# Altium PCB ad_test2_PCB_Temp.PcbDoc
Units mm, origin at the board's own origin, x right, y up, seen from the top; angles counter-clockwise.
Board outline 48 x 22 mm, 2 copper layers (Top Layer, Bottom Layer); 23 components, 22 nets, 98 pads, 16 vias.
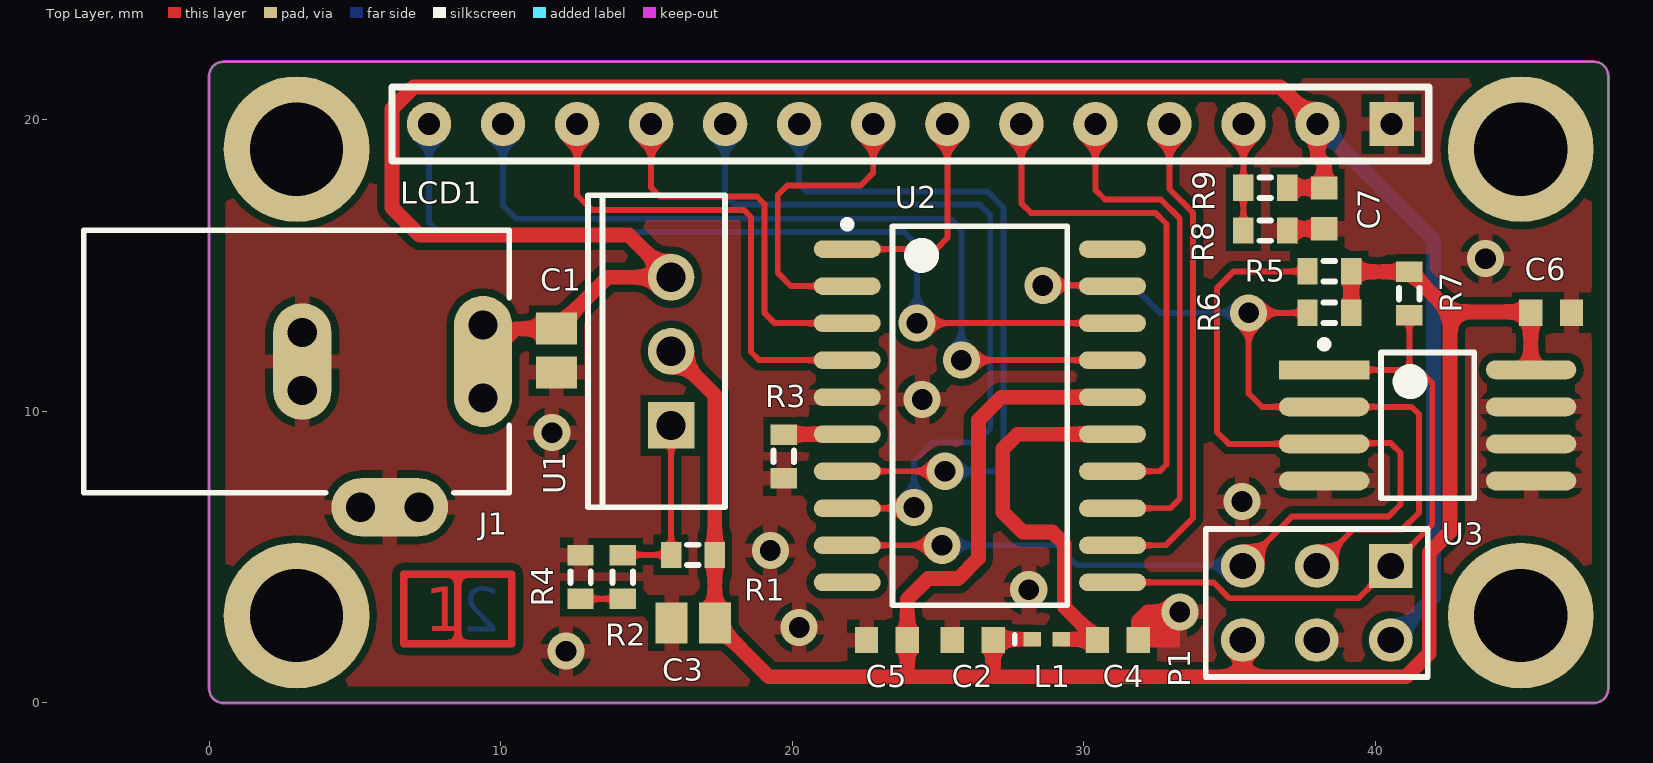
[diagram p0: Top Layer view]
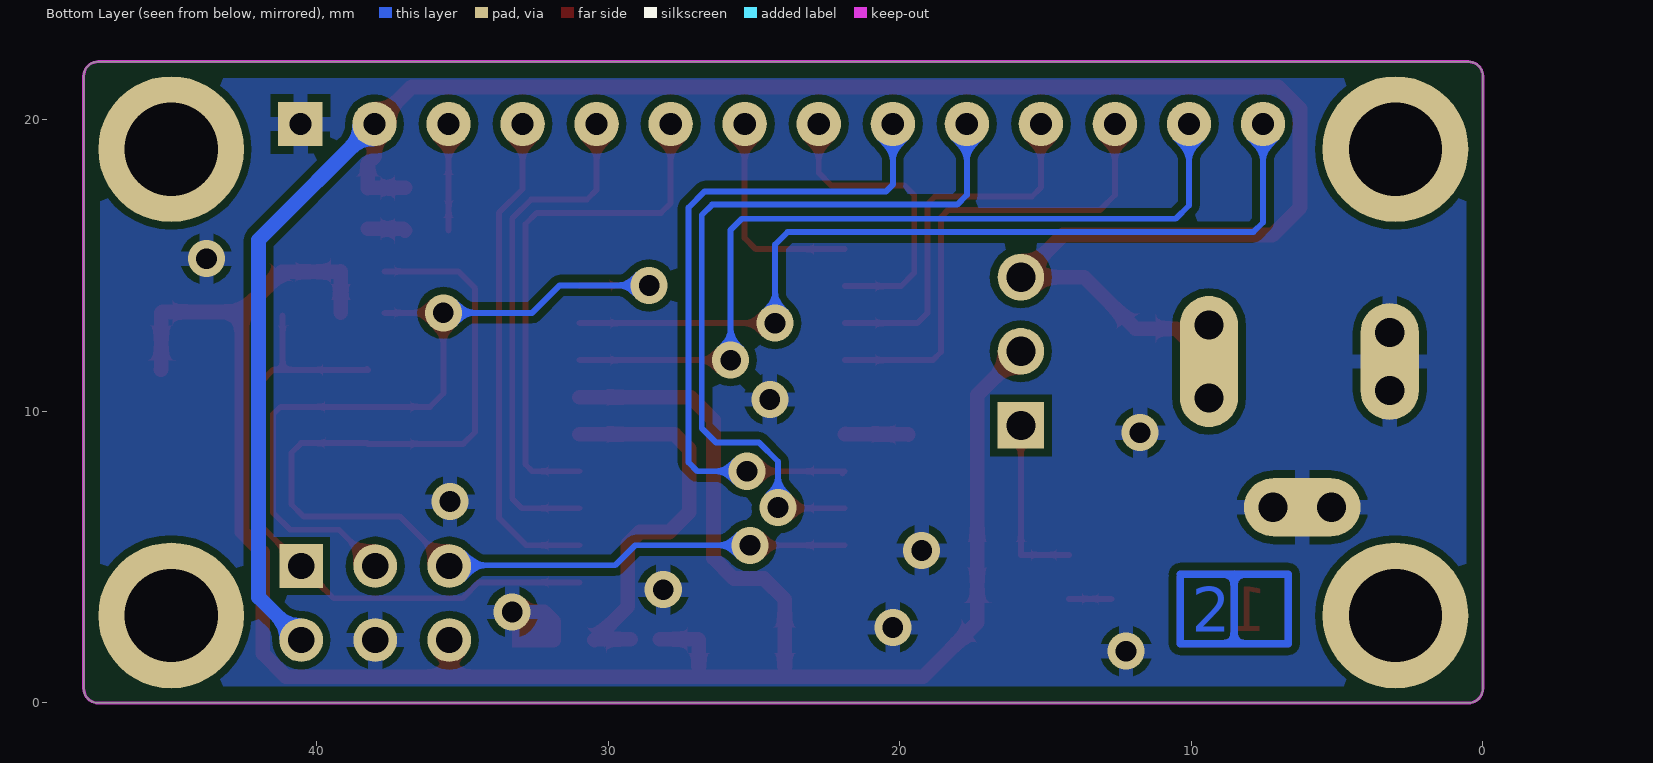
[diagram p1: Bottom Layer view, seen from below]

## Layer stack, top to bottom
Top Solder: solder mask 0.0102, Solder Resist, Dk 3.5
Top Layer: signal copper 0.0356
Dielectric 1: dielectric 0.32, FR-4, Dk 4.8
Bottom Layer: signal copper 0.0356
Bottom Solder: solder mask 0.0102, Solder Resist, Dk 3.5

## Board outline
0,0.5 0,21.5 cw(c0.5,21.5) 0.5,22 47.5,22 cw(c47.5,21.5) 48,21.5 48,0.502 48,0.5 cw(c47.5,0.5) 47.5,0 0.5,0 cw(c0.5,0.5)

## Design rules (kind name [scope] priority, off if disabled: settings)
Clearance Keep-out [(InNetClass('All Nets') AND InPolygon) vs OnLayer('Keep-Out Layer')] p1: gap=0.508 ignorepadtopadclearanceinfootprint=TRUE
Clearance [All] p2: gap=0.254 ignorepadtopadclearanceinfootprint=FALSE except(0: Arc-Hole Track-Hole SMDPad-Hole THPad-Hole Via-Hole Fill-Hole Poly-Hole Region-Hole Text-Hole)
HoleSize [All] p1: absolutevalues=TRUE maxlimit=5.08 minlimit=0.025 maxpercent=80.000 minpercent=20.000
MinimumSolderMaskSliver [All] p1: minsoldermaskwidth=0.127
PolygonConnect [All] p1: connectstyle=Relief reliefconductorwidth=0.508 reliefentries=4 polygonreliefangle="90 Angle" airgapwidth=0.254
RoutingVias [All] p1: holewidth=0.711 width=1.27 viastyle="Through Hole" minholewidth=0.711 minwidth=1.27 maxholewidth=0.711 maxwidth=1.27
SilkToSilkClearance [All] p1: silktosilkclearance=0.025
SilkToSolderMaskClearance [IsPad] p1: minsilkscreentomaskgap=0.025 clearancetoexposedcopper=TRUE
SolderMaskExpansion [All] p1: expansion=0.102
Width [All] p1: maxlimit=0.508 minlimit=0.203 preferedwidth=0.254
26 further rules are at their usual default settings.

## Classes and differential pairs
net class RB[0..7]: RB0 RB1 RB2 RB3 RB4 RB5 RB6 RB7
component class Sensor: C6 U3
component class Power: C1 C2 C3 C4 J1 L1 R1 R2 R3 R4 U1
component class MCU: C5 R5 R6 R7 U2
component class LCD: C7 LCD1 R8 R9
component class ad_test2_top: P1

## Components (designator, comment, footprint, x,y, rotation, side; value= is the part's Value field where it differs from the comment)
C1 "Cap Pol3" C0805 11.913,12.09 r270 top value=100pF (schematic designator C4)
C2 "Cap Semi" 1608[0603] 26.199,2.159 r0 top value=100pF (schematic designator C5)
C3 "Cap Pol3" C0805 16.612,2.743 r180 top value=100pF
C4 "Cap Semi" 1608[0603] 31.177,2.159 r180 top value=100pF (schematic designator C6)
C5 "Cap Semi" 1608[0603] 23.252,2.159 r0 top value=100pF (schematic designator C2)
C6 "Cap Semi" 1608[0603] 46.039,13.386 r180 top value=100pF (schematic designator C7)
C7 "Cap Semi" 1608[0603] 38.252,16.967 r90 top value=100pF (schematic designator C1)
J1 "PWR2.5" KLD-0202 -4.302,11.715 r0 top
L1 "Inductor" 0402-A 28.735,2.184 r0 top value=10mH
LCD1 "DMC-50448N" DMC-50448N 40.564,19.863 r180 top
P1 "Header 3X2" HDR2X3 40.538,4.699 r180 top
R1 "Res3" J1-0603 16.598,5.08 r180 top value=4.7K (schematic designator R6)
R2 "Res3" J1-0603 14.193,4.321 r270 top value=4.7K (schematic designator R7)
R3 "Res3" J1-0603 19.71,8.458 r90 top value=1K (schematic designator R8)
R4 "Res3" J1-0603 12.745,4.321 r90 top value=4.7K (schematic designator R9)
R5 "Res3" J1-0603 38.43,14.808 r180 top value=1K (schematic designator R3)
R6 "Res3" J1-0603 38.43,13.386 r180 top value=1K (schematic designator R4)
R7 "Res3" J1-0603 41.173,14.046 r270 top value=1K (schematic designator R5)
R8 "Res3" J1-0603 36.232,16.205 r0 top value=1K (schematic designator R2)
R9 "Res3" J1-0603 36.232,17.678 r180 top value=1K (schematic designator R1)
U1 "LM317KC" KC03 15.85,12.065 r90 top (schematic designator U2)
U2 "PIC16C770-I/SO" SOIC-SO20_N 26.441,9.855 r0 top (schematic designator U1)
U3 "TCN75" TCN75-SOIC 38.252,11.43 r0 top

## Footprints (in the part's own frame and the unit in brackets; to place one, negate y for a bottom-side part, rotate by r counter-clockwise, add the part's x,y. Pads: shape width x height; smd on the part's side, far side on the other; paste and mask are expansions set on the pad)
0402-A [mm] "Chip Inductor, Body 1.0x0.5mm, IPC High Density"
  rect 0.6x0.5 smd: 1(-0.5,0) 2(0.5,0)
  silkscreen extent -1.1,-0.15 -1.1,0.15, body extent -0.55,-0.3 0.55,0.3, height 0.55
1608[0603] [mm] "Chip Capacitor, Body 1.6x0.8mm, IPC High Density"
  rect 0.8x0.9 smd: 1(-0.7,0) 2(0.7,0)
  body extent -0.87,-0.48 0.87,0.48, height 1.3
C0805 [mm] "Chip Capacitor, Body 2.0x1.3mm, IPC High Density"
  rect 1.1x1.4 smd: 1(-0.75,0) 2(0.75,0)
  body extent -1.1,-0.72 1.1,0.72, height 1.4
DMC-50448N [mil] "LCD,DMC-50448N"
  rect 60x60 hole 30: 1(0,0)
  round 60 hole 30: 2(100,0) 3(200,0) 4(300,0) 5(400,0) 6(500,0) 7(600,0) 8(700,0) 9(800,0) 10(900,0) 11(1000,0) 12(1100,0) 13(1200,0) 14(1300,0)
  silkscreen extent -50,-50 1350,50, body extent -10,50 -10,50, height 10
HDR2X3 [mm] "Connector; Header; 3x2 Position"
  rect 1.5x1.5 hole 0.9: 1(0,0)
  round 1.5 hole 0.9: 2(0,2.54) 3(2.54,0) 4(2.54,2.54) 5(5.08,0) 6(5.08,2.54)
  silkscreen extent -1.27,-1.27 6.35,3.81
J1-0603 [mm] "Chip Resistor, Body 1.6x0.8mm, IPC High Density"
  rect 0.7x0.9 smd: 1(-0.75,0) 2(0.75,0)
  silkscreen extent -0.2,-0.35 0.2,0.35, body extent -0.85,-0.48 0.85,0.48, height 0.9
KC03 [mm] "TO, Thru-Hole, Vertical, Heatsink Mounted; 3 In-Line Leads; Pitch 2.54 mm"
  rect 1.6x1.6 hole 1: 1(-2.54,0)
  round 1.6 hole 1: 2(0,0) 3(2.54,0)
  silkscreen extent -5.35,-1.85 5.35,2.85
KLD-0202 [mm] "DC Power Jack, 2.5mm, KLD Series, PCB Mount"
  oval 2x4.5 all layers, no hole: 1(13.7,0)
  round 1.5 hole 1: 1A(13.7,-1.25) 1B(13.7,1.25) 2A(7.5,-1) 2B(7.5,1) 3A(9.5,-5) 3B(11.5,-5)
  oval 2x4 all layers, no hole: 2(7.5,0)
  oval 4x2 all layers, no hole: 3(10.5,-5)
  silkscreen extent 0,-4.5 14.6,4.5
SOIC-SO20_N [mm] "SOIC, 20-Leads, Body 12.8x7.5mm, Pitch 1.27mm, IPC Medium Density"
  oval 2.3x0.6 smd: 1(-4.55,5.715) 2(-4.55,4.445) 3(-4.55,3.175) 4(-4.55,1.905) 5(-4.55,0.635) 6(-4.55,-0.635) 7(-4.55,-1.905) 8(-4.55,-3.175) 9(-4.55,-4.445) 10(-4.55,-5.715) 11(4.55,-5.715) 12(4.55,-4.445) 13(4.55,-3.175) 14(4.55,-1.905) 15(4.55,-0.635) 16(4.55,0.635) 17(4.55,1.905) 18(4.55,3.175) 19(4.55,4.445) 20(4.55,5.715)
  silkscreen extent -4.67,-6.5 3,6.69, body extent -3.75,-6.5 3.75,6.5, height 2.65
TCN75-SOIC [mm] "TCN75-SOIC, 8-Leads, Body 4.90x3.90mm, Pitch 1.27mm, IPC Low Density"
  rect 3.1x0.65 smd: 1(0,0)
  oval 3.1x0.65 smd: 2(0,-1.27) 3(0,-2.54) 4(0,-3.81) 5(7.1,-3.81) 6(7.1,-2.54) 7(7.1,-1.27) 8(7.1,0)
  silkscreen extent -0.12,-4.41 5.15,1, body extent 1.55,-4.41 5.55,0.6, height 1.75

## Part data
C1 C3: "Polarized Capacitor (Surface Mount)", LatestRevisionDate=29-May-2009, LatestRevisionNote="IPC-7351 Footprint Added.", PackageDescription="Chip Capacitor", PackageReference=C0805, Published=8-Jun-2000, Publisher="Altium Limited"
C2 C4 C5 C6 C7: "Capacitor (Semiconductor SIM Model)", LatestRevisionDate=29-May-2009, LatestRevisionNote="IPC-7351 Footprint Added.", PackageDescription="Chip Capacitor", PackageReference=C1206, Published=8-Jun-2000, Publisher="Altium Limited"
J1: "Low Voltage Power Supply Connector", ComponentLink1Description="Manufacturer Link", ComponentLink1URL=http://domino.kycon.com/internet/Products.html, DatasheetDocument=09-May-2002, Published=17-Dec-2003, Publisher="Altium Limited"
LCD1: "8 Character X 2 Line / LCD Display"
P1: "Header, 3-Pin, Dual row", LatestRevisionDate=17-Jul-2002, LatestRevisionNote="Re-released for DXP Platform.", Publisher="Altium Limited"
R1 R2 R3 R4 R5 R6 R7 R8 R9: "Resistor", LatestRevisionDate=29-May-2009, LatestRevisionNote="IPC-7351 Footprint Added.", PackageDescription="Chip Resistor", PackageReference=J1-0603, Published=8-Jun-2000, Publisher="Altium Limited"
U1: "3-Terminal Adjustable Regulator", ComponentLink1Description="Manufacturer Link", ComponentLink1URL=http://www.ti.com/, DatasheetVersion=Feb-1988, Note="Pin 2 is electrically connected to tab", PackageDescription="TO, Thru-Hole, Vertical, Heatsink Mounted; 3 In-Line Leads; Pitch 2.54 mm", PackageReference=KC03, PackageVersion=Sep-1995, Published=15-Apr-2002, Publisher="Altium Limited"
U2: "8-Bit CMOS Microcontroller with 12-Bit A/D, 2K (x14-Bit words) EPROM, 256 Bytes RAM, 20-Pin SOIC, 4.0 to 5.5V Supply Range, Industrial Temperature", Supplier Part Number 1=PIC16C770-I/SO-ND, Code_IPC=SOIC127P1030-20, Code_JEDEC=MS-013-AC, ComponentAvailability="Unknown. Contact manufacturer to determine status.", ComponentLink1Description=Datasheet, ComponentLink1URL=http://ww1.microchip.com/downloads/en/DeviceDoc/41120b.pdf, ComponentLink2Description="Packaging Specification", ComponentLink2URL=http://www.microchip.com/stellent/groups/techpub_sg/documents/packagingspec/en012702.pdf, ComponentLink3Description="Microchip.com Home", ComponentLink3URL=http://www.microchip.com/, DatasheetVersion="revB, Feb-2002", LatestRevisionDate=29-Jan-2009, LatestRevisionNote="Sch. layout revised. 3D Model Removed.", PackageDescription="20-Lead Plastic Small Outline (SO) - Wide 7.50mm Body [SOIC]", PackageReference=SOIC-SO20, PackageVersion="revBB, Aug-2009", Published=11-Oct-2004, Publisher="Altium Limited", Supplier 1=Digi-Key
U3: "TCN75数字温度传感器将-40°C到+125°C范围内的温度转换为数字"
L1: Code_IEC=1005, Code_JEITA=0402, LatestRevisionDate=29-May-2009, LatestRevisionNote="IPC-7351 Footprint Added.", PackageDescription="Chip Inductor", PackageReference=0402-A, Published=8-Jun-2000, Publisher="Altium Limited"

## Free pads (board coordinates)
  round 5 hole 3.2: 0(3,3) 0(3,19) 0(45,3) 0(45,19)

## Via types
v1: diameter 1.27, hole 0.711, Top Layer to Bottom Layer, 16 vias

## Nets (pads, with @x,y where several pads share a name; then routed paths per layer and width w, separated by ;. In a path a pad name is that pad's centre, name@x,y a point inside that pad or via, vN(x,y) a via of type N, cw(c..) or ccw(c..) an arc to the next point about the centre after c; other vN are vias at no path point)
3V3: C2.2 C3.1 C5.2 C6.2 L1.1 P1.6 R1.1 R5.1 R6.1 R7.1 U1.2 U2.16 U3.8 | length 76.9
  Top Layer w0.508: U1.2 17.348,10.566 R1.1 17.348,2.757 C3.1 19.204,0.901 23.927,0.901 ; L1.1 26.924,2.184 C2.2 26.899,0.926 26.873,0.901 ; U2.16 27.178,10.49 26.391,9.703 26.391,4.962 25.696,4.267 24.663,4.267 23.952,3.556 C5.2 23.952,0.926 23.927,0.901 ; P1.6 35.458,0.901 ; R6.1 R5.1 39.192,14.796 R7.1 41.192,14.796 42.57,13.418 ; U3.8 45.339,11.443 C6.2 45.307,13.418 42.57,13.418 ; 23.927,0.901 26.873,0.901 ; 26.873,0.901 35.458,0.901 ; 35.458,0.901 41.059,0.901 41.859,1.701 41.859,5.158 42.57,5.869 42.57,13.418
5V: C1.1 C7.2 J1.1 J1.1A J1.1B LCD1.2 P1.2 R9.1 U1.3 | length 77.7
  Top Layer w0.508: J1.1 10.524,12.84 C1.1 13.677,14.605 U1.3 14.402,16.053 7.214,16.053 6.274,16.993 6.274,20.389 7.018,21.133 36.754,21.133 LCD1.2 38.024,18.745 38.252,18.517 C7.2 38.241,17.678 R9.1
  Bottom Layer w0.508: LCD1.2 42.001,15.886 42.001,3.621 P1.2
AGND: R3.2 U2.6 | length 2.2
  Top Layer w0.508: R3.2 19.722,9.22 U2.6 U2.6@21.878,9.234
AVDD: C4.2 L1.2 U2.15 | length 13.7
  Top Layer w0.508: L1.2 C4.2@30.452,2.184 ; C4.2 C4.2@30.452,2.184 ; U2.15 29.261,9.22 27.737,9.22 27.229,8.712 27.229,6.553 27.915,5.867 28.6,5.867 28.931,5.867 29.333,5.465 29.333,3.303 C4.2@30.452,2.184
GND: C1.2 C2.1 C3.2 C4.1 C5.1 C6.1 C7.1 J1.2 J1.2A J1.2B J1.3 J1.3A J1.3B LCD1.1 P1.4 R3.1 R4.2 R8.2 U2.5 U3.4 U3.5 U3.6 U3.7 | length 3.5
  Top Layer w0.508: C4.1 31.877,2.794 32.207,3.124 v1(33.299,3.124) ; R8.2 37.044,16.267 C7.1
  other v1: 12.243,1.778 20.244,2.591 28.118,3.886 19.253,5.232 35.433,6.909 11.76,9.271 24.46,10.414 43.79,15.24
NetLCD1_3: LCD1.3 R8.1 R9.2 | length 3.7
  Top Layer w0.203: R8.1 R9.2 35.484,17.68 LCD1.3
NetLCD1_4: LCD1.4 U2.12 | length 17
  Top Layer w0.203: U2.12 32.817,5.41 33.757,6.35 33.757,16.813 32.944,17.625 LCD1.4
NetLCD1_5: LCD1.5 U2.13 | length 17.6
  Top Layer w0.203: LCD1.5 30.404,17.602 30.734,17.272 32.651,17.272 33.299,16.623 33.299,7.01 32.969,6.68 U2.13
NetLCD1_6: LCD1.6 U2.14 | length 18.2
  Top Layer w0.203: LCD1.6 27.864,17.145 28.194,16.815 32.461,16.815 32.842,16.434 32.842,8.179 32.614,7.95 U2.14
NetP1_1: P1.1 R7.2 U2.11 U3.1 | length 22.9
  Top Layer w0.203: U2.11 34.454,4.14 35,3.593 39.433,3.593 P1.1 41.961,6.121 41.961,10.973 41.504,11.43 41.173,11.43 ; U3.1@38.278,11.455 U3.1 41.173,11.43 ; R7.2 41.173,11.43
NetP1_3: P1.3 R6.2 U2.19 U3.2 | length 28.5
  Top Layer w0.203: v1(28.6,14.326) v1@28.626,14.326 ; v1@28.6,14.351 v1@28.626,14.326 ; U2.19 30.966,14.326 v1@28.626,14.326 ; R6.2 v1(35.662,13.386) 35.662,10.617 36.119,10.16 U3.2 41.25,10.16 41.504,9.906 41.504,6.528 40.919,5.944 39.243,5.944 P1.3
  Bottom Layer w0.203: v1(28.6,14.326) 31.674,14.326 32.614,13.386 v1(35.662,13.386)
NetP1_5: P1.5 R5.2 U2.9 U3.3 | length 37
  Top Layer w0.203: U2.9 v1(25.146,5.41) v1@25.222,5.41 ; P1.5@35.609,4.699 P1.5 37.16,6.401 40.462,6.401 40.869,6.807 40.869,8.585 40.538,8.915 38.278,8.915 U3.3 34.976,8.89 34.569,9.296 34.569,14.224 35.154,14.808 R5.2
  Bottom Layer w0.203: v1(25.146,5.41) 29.083,5.41 29.769,4.724 P1.5@35.433,4.724
NetR1_2: R1.2 R2.1 U1.1 | length 6.1
  Top Layer w0.203: R2.1 14.202,5.08 R1.2 15.85,5.081 U1.1
NetR2_2: R2.2 R4.1 | length 1.4
  Top Layer w0.203: R4.1 R2.2
RB0: LCD1.7 U2.1 | length 7.5
  Top Layer w0.203: U2.1 24.943,15.57 25.324,15.951 LCD1.7
RB1: LCD1.8 U2.2 | length 10.5
  Top Layer w0.203: U2.2 19.964,14.3 19.507,14.757 19.507,17.424 19.837,17.755 22.352,17.755 22.784,18.186 LCD1.8
RB2: LCD1.9 U2.7 | length 23.9
  Top Layer w0.203: U2.7@21.968,7.874 U2.7 v1(25.248,7.95) v1@25.349,7.95
  Bottom Layer w0.203: LCD1.9 20.244,17.78 20.472,17.551 26.695,17.551 27.254,16.993 27.254,8.255 26.949,7.95 v1(25.248,7.95)
RB3: LCD1.10 U2.8 | length 26.4
  Top Layer w0.203: U2.8 24.155,6.68 v1(24.181,6.706) ; v1@24.257,6.68 24.282,6.706 v1@24.333,6.706
  Bottom Layer w0.203: LCD1.10 17.704,17.424 18.034,17.094 26.441,17.094 26.797,16.739 26.797,9.423 26.314,8.941 24.837,8.941 24.181,8.284 v1(24.181,6.706) ; v1@24.282,6.706 24.257,6.731 24.257,6.782 v1@24.333,6.706
RB4: LCD1.11 U2.3 | length 13
  Top Layer w0.203: LCD1.11 15.164,17.678 15.469,17.374 18.796,17.374 19.05,17.12 19.05,13.386 19.406,13.03 U2.3
RB5: LCD1.12 U2.4 | length 16.8
  Top Layer w0.203: LCD1.12 12.624,17.424 13.132,16.916 18.339,16.916 18.593,16.662 18.593,12.04 18.872,11.76 U2.4
RB6: LCD1.13 U2.17 | length 28.5
  Top Layer w0.203: v1(25.806,11.76) U2.17
  Bottom Layer w0.203: LCD1.13 10.084,17.069 10.541,16.612 25.425,16.612 25.806,16.231 v1(25.806,11.76)
RB7: LCD1.14 U2.18 | length 29.8
  Top Layer w0.203: v1(24.282,13.03) U2.18
  Bottom Layer w0.203: LCD1.14 7.544,16.485 7.874,16.154 23.851,16.154 24.282,15.723 v1(24.282,13.03)
pads on no net: U2.10 U2.20
copper on no net: | length 29
  Top Layer w0.254: 8.534,2.032 8.534,4.42 ; 10.389,4.318 10.389,2.032 6.68,2.032 6.68,4.42 10.389,4.42
  Bottom Layer w0.254: 8.534,2.032 8.534,4.42 ; 10.389,4.318 10.389,2.032 6.68,2.032 6.68,4.42 10.389,4.42

## Polygon pours and split planes (outlines as drawn)
GND on Bottom Layer "GND_L02_P006" (solid, remove dead copper, pour order 6): 0,0.762 0,21.336 cw(c0.762,21.336) 0.762,22.098 50.038,22.098 cw(c50.038,21.336) 50.8,21.336 50.8,0.762 cw(c50.038,0.762) 50.038,0 0.762,0 cw(c0.762,0.762)
GND on Top Layer "GND_L01_P008" (solid, remove dead copper, pour order 8): 0.762,0 cw(c0.762,0.762) 0,0.762 0,21.336 cw(c0.762,21.336) 0.762,22.098 47.498,22.098 cw(c47.498,21.336) 48.26,21.336 48.26,0.762 cw(c47.498,0.762) 47.498,0

## Keep-outs
Keep-Out Layer:
  lines w0.1: 0,0.5 ccw(c0.5,0.5) 0.5,0 47.5,0 ccw(c47.5,0.5) 48,0.5 48,21.5 ccw(c47.5,21.5) 47.5,22 0.5,22 ccw(c0.5,21.5) 0,21.5 0,0.5

## Other copper
Top Layer:
  region net GND: 31.877,1.905 31.877,2.794 32.207,3.124 33.299,3.124 33.299,1.905
  text "1" at 7.391,2.464 h1.52
Bottom Layer:
  text "2" at 9.982,2.438 h1.52

## Silkscreen, mask and mechanical layers (free items; w line width, h text height)
Mechanical 1:
  lines w0.1: 47.498,0 0.5,0 cw(c0.5,0.5) 0,0.5 0,21.5 cw(c0.5,21.5) 0.5,22 47.5,22 cw(c47.5,21.5) 48,21.5 48,0.502 ; 47.5,0 ccw(c47.5,0.5) 48,0.5

## Dimensions
0,21.5 to 48,21.5 on Mechanical 6
0.5,22 to 0.5,0 on Mechanical 6